# Altium PCB RobotCtrl_V2_Mother-board.PcbDoc
Units mm, origin at the board's own origin, x right, y up, seen from the top; angles counter-clockwise.
Board outline 100 x 100 mm, 2 copper layers (Top Layer, Bottom Layer); 90 components, 155 nets, 450 pads, 4 vias.
Unrouted connection lines stored in the file: 249.
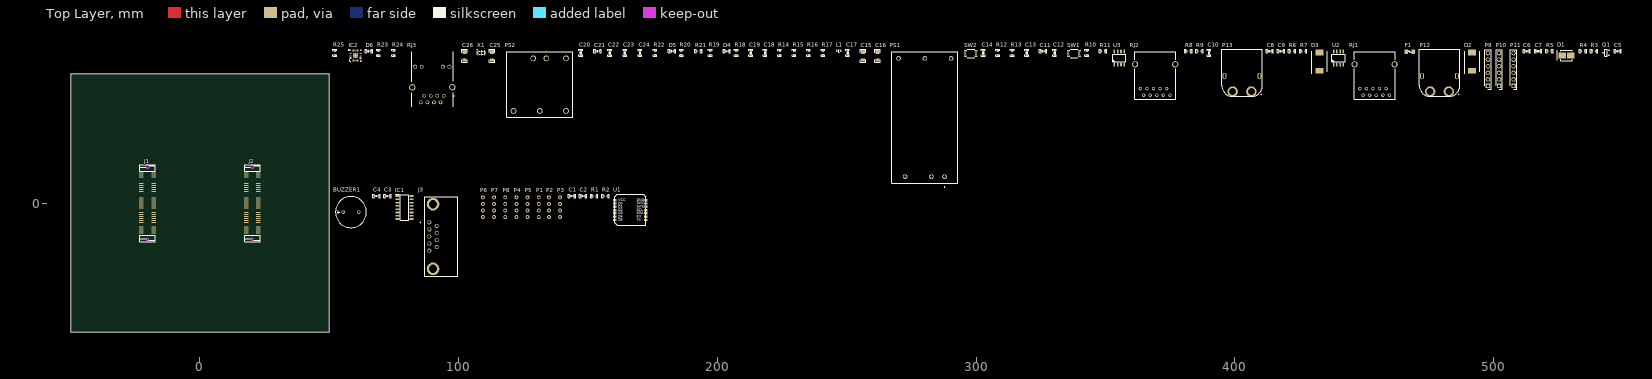
[diagram p0: Top Layer view]
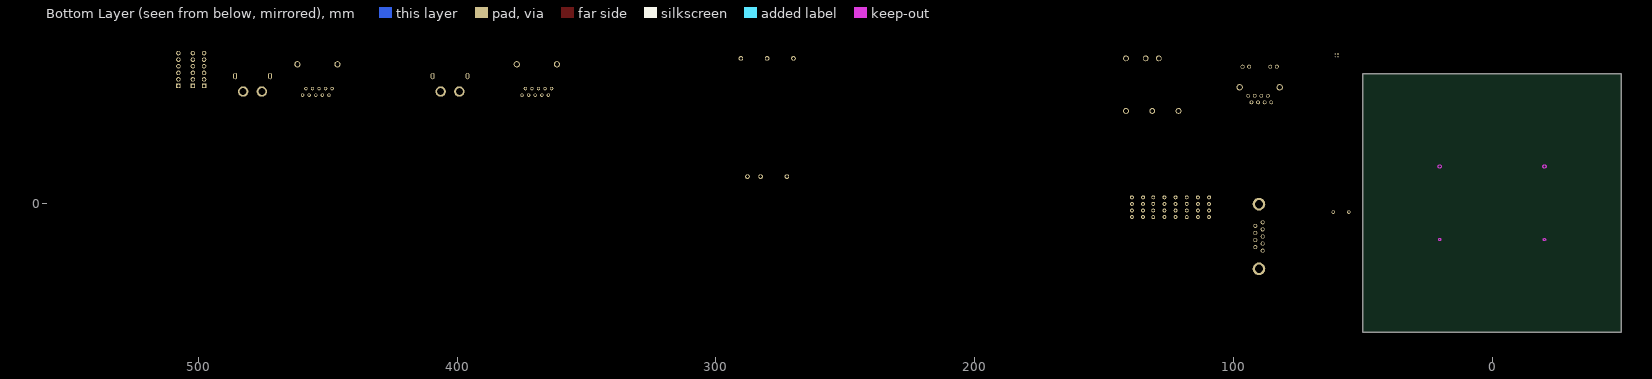
[diagram p1: Bottom Layer view, seen from below]

## Layer stack, top to bottom
Top Solder: solder mask 0.0102, Solder Resist, Dk 3.5
Top Layer: signal copper 0.0356
Dielectric 1: dielectric 0.32, FR-4, Dk 4.8
Bottom Layer: signal copper 0.0356
Bottom Solder: solder mask 0.0102, Solder Resist, Dk 3.5

## Board outline
-50,-50 50,-50 50,50 -50,50

## Design rules (kind name [scope] priority, off if disabled: settings)
Clearance [All] p1: gap=0.254 ignorepadtopadclearanceinfootprint=FALSE except(0: Arc-Hole Track-Hole SMDPad-Hole THPad-Hole Via-Hole Fill-Hole Poly-Hole Region-Hole Text-Hole)
DiffPairsRouting [All] p1: maxlimit=0.254 minlimit=0.254 mostfreqgap=0.254 toplayer_minwidth=0.381 toplayer_maxwidth=0.381 toplayer_prefwidth=0.381 bottomlayer_minwidth=0.381 bottomlayer_maxwidth=0.381 bottomlayer_prefwidth=0.381 maxuncoupledlength=12.7
PolygonConnect [All] p1: connectstyle=Relief reliefconductorwidth=0.254 reliefentries=4 polygonreliefangle="90 Angle" airgapwidth=0.254
RoomDefinition RobotCtrl_V2_Mother-board [InComponentClass('RobotCtrl_V2_Mother-board')] p1: confinementstyle=ConfineIn formatcopy=TRUE lockcomponents=FALSE outline 51.092,-29.553 549.821,-29.553 549.821,62.268 51.092,62.268
RoutingVias [All] p1: holewidth=0.711 width=1.27 viastyle="Through Hole" minholewidth=0.711 minwidth=1.27 maxholewidth=0.711 maxwidth=1.27
SolderMaskExpansion [All] p1: expansion=0.102 istentingtop=FALSE
Width [All] p1: maxlimit=0.254 minlimit=0.254 preferedwidth=0.254
29 further rules are at their usual default settings.

## Classes and differential pairs
differential pair CAN2: +CAN2_P -CAN2_N
differential pair CAN1: +CAN1_P -CAN1_N

## Components (designator, comment, footprint, x,y, rotation, side; value= is the part's Value field where it differs from the comment)
BUZZER1 "TMB12A12" DIP,P=7.6mm 58.331,-3.518 r0 top
C1 "10uF" CAP-0603 143.802,2.705 r0 top
C2 "100nF" CAP-0603 148.12,2.705 r0 top
C3 "100nF" CAP-0603 72.555,2.705 r0 top
C4 "100nF" CAP-0603 68.237,2.705 r0 top
C5 "100nF" CAP-0603 548.043,58.712 r0 top
C6 "100nF" CAP-0603 512.864,58.712 r0 top
C7 "100nF" CAP-0603 517.309,58.712 r0 top
C8 "47nF" CAP-0603 413.55,58.712 r0 top
C9 "47nF" CAP-0603 417.868,58.712 r0 top
C10 "100nF" CAP-0603 390.055,58.077 r90 top
C11 "47nF" CAP-0603 325.92,58.712 r0 top
C12 "47nF" CAP-0603 330.365,58.077 r90 top
C13 "100nF" CAP-0603 319.57,58.077 r90 top
C14 "100nF" CAP-0603 302.806,58.077 r90 top
C15 "100nF" CAP-AUX-3216 256.07,57.188 r90 top
C16 "100nF" CAP-AUX-3216 261.658,57.188 r90 top
C17 "100nF" CAP-0603 250.355,58.077 r90 top
C18 "100nF" CAP-0603 218.478,58.077 r90 top
C19 "100nF" CAP-0603 212.89,58.077 r90 top
C20 "10pF" CAP-0603 147.231,58.077 r90 top
C21 "10pF" CAP-0603 153.708,58.712 r0 top
C22 "10pF" CAP-0603 158.407,58.077 r90 top
C23 "10pF" CAP-0603 164.249,58.077 r90 top
C24 "22nF" CAP-0603 170.091,58.077 r90 top
C25 "100nF" CAP-AUX-3216 112.687,57.188 r90 top
C26 "100nF" CAP-AUX-3216 102.019,57.188 r90 top
D1 "SMBJ12CA" DO-214AA/SMB 528.231,57.061 r0 top
D2 "SS56" DO-214AB/SMC 491.782,54.648 r90 top
D3 "TPSMCJ30CA" DO-214AB/SMC 432.727,54.648 r90 top
D4 "GREEN" LED-0603 203.619,58.712 r0 top
D5 "GREEN" LED-0603 182.537,58.712 r0 top
D6 "GREEN" LED-0603 65.316,58.712 r0 top
F1 "7A 32V 快断" FUSE_1206 467.652,58.458 r0 top
IC1 "SP3232EEN-L/TR" SOIC-16_150mil 79.032,-1.74 r0 top
IC2 "LAN8720A-CP-TR" QFN-24-4x4 60.109,57.061 r0 top
J1 "3710M060037G3FT01" 3710M060037G3FT01 -22.606,-11.6 r180 top locked
J2 "3710M060037G3FT01" 3710M060037G3FT01 17.906,-11.6 r180 top locked
J3 "D-DMR009PF-D002" "Through Hole,P=2.77mm" 88.684,-7.455 r90 top
L1 "220R/2A/0.05DCR" L-0603 246.164,58.839 r0 top
P1 "HDR1x4_2.54" HDR1x4_2.54_180 130.975,2.197 r0 top
P2 "HDR1x4_2.54" HDR1x4_2.54_180 134.912,2.197 r0 top
P3 "HDR1x4_2.54" HDR1x4_2.54_180 139.23,2.197 r0 top
P4 "HDR1x4_2.54" HDR1x4_2.54_180 122.339,2.197 r0 top
P5 "HDR1x4_2.54" HDR1x4_2.54_180 126.657,2.197 r0 top
P6 "HDR1x4_2.54" HDR1x4_2.54_180 109.385,2.197 r0 top
P7 "HDR1x4_2.54" HDR1x4_2.54_180 113.703,2.197 r0 top
P8 "HDR1x4_2.54" HDR1x4_2.54_180 118.021,2.197 r0 top
P9 "HDR1x6" HDR1X6_2.54_180 497.878,45.25 r90 top
P10 "HDR1x6" HDR1X6_2.54_180 502.196,45.25 r90 top
P11 "HDR1x6" HDR1X6_2.54_180 507.784,45.25 r90 top
P12 "XT30/60" XT60PW-M 475.526,43.091 r0 top
P13 "XT30/60" XT60PW-M 399.199,43.091 r0 top
PS1 "URB2412LD-30WR3" URB2412LD30WR3 287.82,10.198 r90 top
PS2 "URB2405YMD-15WR3" URB2405YMD15WR3 133.896,55.918 r0 top
Q1 "S9013" SOT-23-3 543.471,58.077 r0 top
R1 "4.7k" R-0603 152.438,2.705 r0 top
R2 "4.7k" R-0603 156.756,2.705 r0 top
R3 "1k" R-0603 538.899,58.712 r0 top
R4 "10k" R-0603 534.581,58.712 r0 top
R5 "10k" R-0603 521.627,58.712 r0 top
R6 "60R" R-0603 422.186,58.712 r0 top
R7 "60R" R-0603 426.504,58.712 r0 top
R8 "60R" R-0603 382.054,58.712 r0 top
R9 "60R" R-0603 386.372,58.712 r0 top
R10 "60R" R-0603 342.811,58.077 r90 top
R11 "60R" R-0603 349.034,58.712 r0 top
R12 "60R" R-0603 308.394,58.077 r90 top
R13 "60R" R-0603 313.982,58.077 r90 top
R14 "49.9R" R-0603 224.066,58.077 r90 top
R15 "49.9R" R-0603 229.654,58.077 r90 top
R16 "49.9R" R-0603 235.242,58.077 r90 top
R17 "49.9R" R-0603 240.83,58.077 r90 top
R18 "510R" R-0603 207.302,58.077 r90 top
R19 "4.7k" R-0603 197.269,58.077 r90 top
R20 "510R" R-0603 186.093,58.077 r90 top
R21 "510R" R-0603 192.697,58.712 r0 top
R22 "4.7k" R-0603 175.933,58.077 r90 top
R23 "10k" R-0603 68.999,58.077 r90 top
R24 "12k" R-0603 74.841,58.077 r90 top
R25 "4.7k" R-0603 52.108,58.077 r90 top
RJ1 "R-RJ45R10P-B000" RRJ45R10PB000 459.778,41.694 r0 top
RJ2 "R-RJ45R10P-B000" RRJ45R10PB000 374.942,41.694 r0 top
RJ3 "HR911105A" HR911105A 94.272,41.44 r0 top
SW1 "KEY" KEY-4P-4.2*3.4*2.5 337.858,57.823 r0 top
SW2 "KEY" KEY-4P-4.2*3.4*2.5 297.98,57.823 r0 top
U1 "WT931" WT931 147.485,-12.789 r0 top
U2 "TJA1050" SOIC_8 440.093,56.045 r0 top
U3 "TJA1050" SOIC_8 355.384,56.045 r0 top
X1 "25MHz" SMD3213-3P 108.75,58.077 r0 top

## Footprints (in the part's own frame and the unit in brackets; to place one, negate y for a bottom-side part, rotate by r counter-clockwise, add the part's x,y. Pads: shape width x height; smd on the part's side, far side on the other; paste and mask are expansions set on the pad)
3710M060037G3FT01 [mm]
  rect 1.7x0.3 smd: 1(-4.7,0) 2(-4.7,-0.8) 3(-4.7,-1.6) 4(-4.7,-2.4) 5(-4.7,-3.2) 6(-4.7,-4) 7(-4.7,-4.8) 8(-4.7,-5.6) 9(-4.7,-6.4) 10(-4.7,-7.2) 11(-4.7,-8) 12(-4.7,-8.8) 13(-4.7,-9.6) 14(-4.7,-10.4) 15(-4.7,-11.2) 16(-4.7,-12) 17(-4.7,-12.8) 18(-4.7,-13.6) 19(-4.7,-14.4) 20(-4.7,-15.2) 21(-4.7,-16) 22(-4.7,-16.8) 23(-4.7,-17.6) 24(-4.7,-18.4) 25(-4.7,-19.2) 26(-4.7,-20) 27(-4.7,-20.8) 28(-4.7,-21.6) 29(-4.7,-22.4) 30(-4.7,-23.2) 31(0,-23.2) 32(0,-22.4) 33(0,-21.6) 34(0,-20.8) 35(0,-20) 36(0,-19.2) 37(0,-18.4) 38(0,-17.6) 39(0,-16.8) 40(0,-16) 41(0,-15.2) 42(0,-14.4) 43(0,-13.6) 44(0,-12.8) 45(0,-12) 46(0,-11.2) 47(0,-10.4) 48(0,-9.6) 49(0,-8.8) 50(0,-8) 51(0,-7.2) 52(0,-6.4) 53(0,-5.6) 54(0,-4.8) 55(0,-4) 56(0,-3.2) 57(0,-2.4) 58(0,-1.6) 59(0,-0.8) 60(0,0)
  Keep-Out Layer circle w0.152: c-2.35,2.525 r0.45
  Keep-Out Layer circle w0.152: c-2.35,-25.725 r0.65
  silkscreen extent -5.35,-26.47 0.65,3.27
CAP-0603 [mm]
  rect 0.8x0.96 smd: 1(-0.79,0) 2(0.79,0)
  silkscreen extent -1.42,-0.71 1.42,0.71, body extent -0.76,-0.39 0.76,0.39, height 0.9
CAP-AUX-3216 [mil] "îãµçÈÝ1206´óÐ¡"
  rect 50x60 smd: 1(44,-8) 2(-76,-8)
  silkscreen extent -111,-48 89,32, body extent -82,-45 52,26, height 67
DIP,P=7.6mm [mm]
  round 1.3 hole 0.8: 1(-2.952,0) 2(3.048,0)
  silkscreen extent -5.95,-6 6.04,6, body extent -5.95,-6 6.05,6, height 9.9
DO-214AA/SMB [mm]
  rect 2.85x2.25 smd: 1(1.675,0) 2(-1.675,0)
  silkscreen extent -3.6,-2 2.3,2, body extent -2.5,-1.97 2.5,1.97, height 2.44
DO-214AB/SMC [mm]
  rect 2.2x3.1 smd: 1(3.5,0) 2(-3.5,0)
  silkscreen extent -4.6,-2.95 3.97,2.95, body extent -3.97,-2.95 3.97,2.95, height 2.5
FUSE_1206 [mm]
  rect 1.3x1.7 smd: 1(-1.4,0) 2(1.4,0)
  silkscreen extent -0.53,-0.23 0.51,0.23, body extent -1.6,-0.8 1.6,0.8, height 1.01
HDR1x4_2.54_180 [mm]
  round 1.5 hole 0.813: 1(0,0) 2(0,-2.54) 3(0,-5.08) 4(0,-7.62)
  body extent -1.25,-8.89 1.25,1.27, height 8.2
HDR1X6_2.54_180 [mm]
  rect 1.725x1.725 hole 1.15: 1(0,0)
  round 1.725 hole 1.15: 2(2.54,0) 3(5.08,0) 4(7.62,0) 5(10.16,0) 6(12.7,0)
  silkscreen extent -1.27,-1.2 13.97,1.2, body extent -1.27,-1.2 13.97,1.2, height 8.58
HR911105A [mm]
  round 1.446 hole 0.89: 1(0,0) 2(-1.27,-2.54) 3(-2.54,0) 4(-3.81,-2.54) 5(-5.08,0) 6(-6.35,-2.54) 7(-7.62,0) 8(-8.89,-2.54)
  round 1.53 hole 1.02: 9(2.18,11.25) 10(-0.36,11.25) 11(-8.53,11.25) 12(-11.07,11.25)
  round 2.445 hole 1.63: MH1(3.3,3.3) MH2(-12.19,3.3)
  round 1.625 hole 3.25 unplated: MH3(1.27,6.35) MH4(-10.16,6.35)
  silkscreen extent -12.46,-4.3 4.1,17, body extent -12.39,-4.08 3.49,17.32, height 13.53
KEY-4P-4.2*3.4*2.5 [mm] "SKRPABE010"
  rect 1.2x0.65 smd: 1(-2.075,1.075) 1(2.075,1.075) 2(-2.075,-1.075) 2(2.075,-1.075)
  silkscreen extent -2.15,-1.6 2.05,1.6, body extent -2.35,-1.6 2.25,1.6, height 2.5
L-0603 [mm]
  rect 0.65x0.95 smd: 1(0,0) 2(1.5,0)
  silkscreen extent 0.57,-0.48 0.93,0.48, body extent -0.12,-0.48 1.63,0.48, height 0.35
LED-0603 [mm]
  rect 0.8x0.96 smd: 1(-0.79,0) 2(0.79,0)
  silkscreen extent -1.42,-0.71 1.42,0.71, body extent -0.81,-0.4 0.81,0.4, height 0.6
QFN-24-4x4 [mm] "QFN, 24-Leads, Body 4.00x4.00mm, Pitch 0.50mm, Thermal Pad 2.70x2.60mm, IPC Medium Density"
  oval 0.8x0.25 smd: 1(-1.95,1.25) 2(-1.95,0.75) 3(-1.95,0.25) 4(-1.95,-0.25) 5(-1.95,-0.75) 6(-1.95,-1.25) 13(1.95,-1.25) 14(1.95,-0.75) 15(1.95,-0.25) 16(1.95,0.25) 17(1.95,0.75) 18(1.95,1.25)
  oval 0.25x0.8 smd: 7(-1.25,-1.95) 8(-0.75,-1.95) 9(-0.25,-1.95) 10(0.25,-1.95) 11(0.75,-1.95) 12(1.25,-1.95) 19(1.25,1.95) 20(0.75,1.95) 21(0.25,1.95) 22(-0.25,1.95) 23(-0.75,1.95) 24(-1.25,1.95)
  rect 2x2 smd: 25(0,0)
  silkscreen extent -2.79,-2.2 2.2,2.2, body extent -2.07,-2.07 2.07,2.07, height 0.9
R-0603 [mm]
  rect 0.8x0.96 smd: 1(-0.79,0) 2(0.79,0)
  silkscreen extent -1.42,-0.71 1.42,0.71, body extent -0.76,-0.38 0.76,0.38, height 0.41
RRJ45R10PB000 [mm]
  round 1.3 hole 0.8: 1(0,0) 2(-1.27,2.54) 3(-2.54,0) 4(-3.81,2.54) 5(-5.08,0) 6(-6.35,2.54) 7(-7.62,0) 8(-8.89,2.54) 9(-10.16,0) 10(-11.43,2.54)
  round 1.6 hole 3.2 unplated: MH1(0,8.89) MH2(-11.43,8.89)
  round 2.4 hole 1.6: MH3(2.035,11.94) MH4(-13.465,11.94)
  silkscreen extent -13.61,-1.61 2.18,16.79, body extent -14.16,-1.61 2.74,16.79, height 13.45
SMD3213-3P [mm]
  rect 0.4x2.1 smd: 1(-1.2,0) 2(0,0) 3(1.2,0)
  silkscreen extent -1.6,-0.65 1.6,1.27, body extent -1.6,-0.65 1.6,0.65, height 0.7
SOIC-16_150mil [mm]
  rect 1.5x0.65 smd: 1(-2.7,4.445) 2(-2.7,3.175) 3(-2.7,1.905) 4(-2.7,0.635) 5(-2.7,-0.635) 6(-2.7,-1.905) 7(-2.7,-3.175) 8(-2.7,-4.445) 9(2.7,-4.445) 10(2.7,-3.175) 11(2.7,-1.905) 12(2.7,-0.635) 13(2.7,0.635) 14(2.7,1.905) 15(2.7,3.175) 16(2.7,4.445)
  silkscreen extent -3.45,-4.95 1.6,5.12, body extent -3,-4.95 3,4.95, height 1.75
SOIC_8 [mil]
  oval 24x60 smd: 1(-75,-100.02) 2(-25,-100.02) 3(25,-100.02) 4(75,-100.02) 5(75,99.98) 6(25,99.98) 7(-25,99.98) 8(-75,99.98)
  silkscreen extent -100,-55 100,55, body extent -96,-118 96,118, height 69
SOT-23-3 [mil]
  rect 30x24 smd: 1(47,-38) 2(47,38) 3(-47,0)
  silkscreen extent -21,-53 21,53, body extent -55,-57 55,57, height 51
"Through Hole,P=2.77mm" [mil]
  round 61.46 hole 40.98: 1(0,0) 2(-107.99,0) 3(-215.98,0) 4(-323.98,0) 5(-431.97,0) 6(-54.02,-111.97) 7(-162.01,-111.97) 8(-270,-111.97) 9(-377.99,-111.97)
  round 192.01 hole 128: MH1(-707.99,-55.98) MH2(276.02,-55.98)
  silkscreen extent -822,-430 391,141, body extent -826,-679 394,65, height 477
URB2405YMD15WR3 [mm]
  round 2.25 hole 1.5: 1(7.62,0) 2(0,0) 3(-5.08,0) 4(-12.7,-20.32) 5(-2.54,-20.32) 6(7.62,-20.32)
  silkscreen extent -15.24,-22.86 10.16,3.2, body extent -15.24,-22.86 10.16,2.54, height 12.3
URB2412LD30WR3 [mm]
  round 1.8 hole 1.2: 1(0,15.24) 2(0,5.08) 3(0,0) 4(45.72,-2.54) 5(45.72,7.62) 6(45.72,17.78)
  silkscreen extent -4.1,-5.08 48.26,20.32, body extent -2.54,-5.08 48.26,20.32, height 16.9
WT931 [mm]
  rect 1.4x0.9 smd: 1(12.812,13.866) 2(12.812,7.516) 3(12.812,8.786) 4(12.812,10.056) 5(12.812,6.246) 5(12.812,11.326) 6(12.812,12.596) 8(24.812,13.866) 9(24.812,12.596) 10(24.812,11.326) 11(24.812,10.056) 12(24.812,8.786) 13(24.812,7.516) 14(24.812,6.246)
  silkscreen extent 12.79,4.21 24.79,16.21, body extent 12.83,4.19 24.77,16.13, height 1.5
XT60PW-M [mm]
  oval 1.5x2.5 hole 0.7 slot 1.8 at 90 deg: 0(-3.15,6) 0(10.35,6)
  round 4 hole 2.7: 1(7.2,0) 2(0,0)
  silkscreen extent -4.2,-1.9 11.5,16.3, body extent -4.3,-1.95 11.6,16.35, height 8.45

## Part data
BUZZER1: library part BUZZER, "TMB12A12 有源蜂鸣器"
C1 C2 C3 C4 C5 C6 C7 C8 C9 C10 C11 C12 C13 C14 C17 C18 C19 C20 C21 C22 C23 C24: library part CAP, "贴片电容", Package=0402, SuppliersPartNumber=C52923, ComponentLink1Description=供应商链接, ComponentLink1URL=http://www.szlcsc.com/product/details_53938.html, Supplier=LC
C15 C16 C25 C26: library part CAP-POL, "KM101M050F115A", Package=3528, SuppliersPartNumber=C16133, ComponentLink1Description=供应商链接, ComponentLink1URL=http://www.szlcsc.com/product/details_16815.html, Supplier=LC
D1 D3: library part TVS_C
D2: library part DIODE_Schottky, "肖特基二极管"
D4 D5 D6: library part LED, "发光二极管", Package=0603, SuppliersPartNumber=C2290, ComponentLink1Description=供应商链接, ComponentLink1URL=http://www.szlcsc.com/product/details_2663.html, Supplier=LC
F1: library part Fuse, "0437007.WR"
IC1: library part SP3232EEN, "RS232 芯片", Manufacturer_Name=MaxLinear, Mouser Part Number=701-SP3232EEN-L/TR, Arrow Part Number=SP3232EEN-L/TR, Arrow Price/Stock=https://www.arrow.com/en/products/sp3232een-ltr/maxlinear-inc, Datasheet Link=https://www.maxlinear.com/ds/sp3222e_sp3232e.pdf, Height=1.75mm, Manufacturer_Part_Number=SP3232EEN-L/TR, Mouser Price/Stock=https://www.mouser.co.uk/ProductDetail/MaxLinear/SP3232EEN-L-TR?qs=Hy8V1%2FADhVKNh9v9NvoeCw%3D%3D
IC2: "Integrated Circuit", Manufacturer_Name=Microchip, Mouser Part Number=886-LAN8720A-CP-TR, Arrow Part Number=LAN8720A-CP-TR, Arrow Price/Stock=https://www.arrow.com/en/products/lan8720a-cp-tr/microchip-technology?region=nac, Datasheet Link=https://componentsearchengine.com/Datasheets/1/LAN8720A-CP-TR.pdf, Height=1mm, Manufacturer_Part_Number=LAN8720A-CP-TR, Mouser Price/Stock=https://www.mouser.co.uk/ProductDetail/Microchip-Technology/LAN8720A-CP-TR?qs=pA5MXup5wxG3QiSvrqf%2FHQ%3D%3D
J1 J2: library part 3710M/F, "B2B Connector"
J3: library part DB9, "D-Sub 连接器", Arrow Part Number=5747844-5, Manufacturer_Name="TE Connectivity", Mouser Part Number=571-5747844-5, Arrow Price/Stock=https://www.arrow.com/en/products/5747844-5/te-connectivity, Datasheet Link=http://www.te.com/commerce/DocumentDelivery/DDEController?Action=srchrtrv&DocNm=82068_AMPLIMITE_Right-Angle_Posted_Conn&DocType=Catalog+Section&DocLang=English&PartCntxt=, Height=12.9286mm, Manufacturer_Part_Number=5747844-5, Mouser Price/Stock=https://www.mouser.co.uk/ProductDetail/TE-Connectivity/5747844-5?qs=x6EjVpvqMVPrkQsJHUlJGw%3D%3D
L1: library part BEAD, "BLM18KG221SN1D", Package=0402, SuppliersPartNumber=C32041, ComponentLink1Description=供应商链接, ComponentLink1URL=http://www.szlcsc.com/product/details_33003.html, Supplier=LC
P1 P2 P3 P4 P5 P6 P7 P8: "Header"
P9 P10 P11: library part HDR1x6_2.54, "Header"
PS1: "金升阳隔离电源", Manufacturer_Name=Mornsun, Manufacturer_Part_Number=URB2412LD-30WHR3, Datasheet Link=https://4donline.ihs.com/images/VipMasterIC/IC/MNSN/MNSN-S-A0002273855/MNSN-S-A0002273855-1.pdf?hkey=EF798316E3902B6ED9A73243A3159BB0, Height=16.8mm
PS2: "金升阳隔离电源", Manufacturer_Name=Mornsun, Manufacturer_Part_Number=URB2405YMD-10WR3, Datasheet Link=https://www.mornsun-power.com/html/pdf/URB2405YMD-10WR3.html, Height=12.2mm
Q1: library part BJT_NPN
R1 R2 R3 R4 R5 R6 R7 R8 R9 R10 R11 R12 R13 R14 R15 R16 R17 R18 R19 R20 R21 R22 R23 R24 R25: library part RES, "贴片电阻", Package=0805, SuppliersPartNumber=C17798, Supplier=LC
RJ1 RJ2: library part RJ45
RJ3: library part RJ45_LED
SW1 SW2: "按键开关"
U1: "陀螺仪模组"
U2 U3: "CAN 控制器（5V）"
X1: library part XTAL, "CSTCE25M00G51-R0"

## Via types
v1: diameter 0.606, hole 0.3, Top Layer to Bottom Layer, 4 vias

## Nets (pads, with @x,y where several pads share a name; then routed paths per layer and width w, separated by ;. In a path a pad name is that pad's centre, name@x,y a point inside that pad or via, vN(x,y) a via of type N, cw(c..) or ccw(c..) an arc to the next point about the centre after c; other vN are vias at no path point)
CAN1_N: R8.2 R9.1 RJ1.2 U2.6
CAN1_P: R6.1 R7.2 RJ1.1 U2.7
CAN2_N: R12.2 R13.1 RJ2.2 U3.6
CAN2_P: R10.1 R11.2 RJ2.1 U3.7
GBAT: C15.2 C25.2 D3.1 P12.2 P13.2 PS1.2 PS2.2
GND: C1.2 C2.2 C3.1 C6.1 C7.1 C8.2 C9.2 C10.1 C11.2 C12.2 C13.1 C14.1 C16.2 C17.1 C18.1 C19.1 C20.1 C21.1 C22.1 C23.1 C24.1 C26.2 D1.1 D4.2 D5.2 D6.2 IC1.15 IC2.25 J1.31 J1.32 J2.30 J2.31 J3.5 P3.1 P3.2 P3.3 P3.4 P4.4 P5.4 P6.4 P7.4 P8.4 P11.1 P11.2 P11.3 P11.4 P11.5 P11.6 PS1.5 PS2.6 Q1.2 R4.1 R5.1 R20.1 R21.1 R23.2 R24.2 RJ1.MH1 RJ1.MH2 RJ1.MH3 RJ1.MH4 RJ2.MH1 RJ2.MH2 RJ2.MH3 RJ2.MH4 RJ3.7 RJ3.8 RJ3.MH1 RJ3.MH2 RJ3.MH3 RJ3.MH4 SW1.2 SW2.2 U1.8 U2.2 U2.8 U3.2 U3.8 X1.2
  other v1: 59.559,56.511 60.659,56.511 59.559,57.611 60.659,57.611
LED_LINK: IC2.3 RJ3.9
LED_SPEED: IC2.2 RJ3.10
NetBUZZER1_2: BUZZER1.2 Q1.3
NetC4_1: C4.1 IC1.3
NetC4_2: C4.2 IC1.1
NetC5_1: C5.1 IC1.5
NetC5_2: C5.2 IC1.4
NetC6_2: C6.2 IC1.2
NetC7_2: C7.2 IC1.6
NetC8_1: C8.1 R6.2 R8.1
NetC9_1: C9.1 R7.1 R9.2
NetC11_1: C11.1 R10.2 R12.1
NetC12_1: C12.1 R11.1 R13.2
NetC20_2: C20.2 IC2.21 R14.1 RJ3.1
NetC21_2: C21.2 IC2.20 R15.1 RJ3.2
NetC22_2: C22.2 IC2.23 R16.1 RJ3.3
NetC23_2: C23.2 IC2.22 R17.1 RJ3.6
NetD1_2: D1.2 J3.MH1 J3.MH2 R4.2
NetD2_1: D2.1 D3.2 F1.2
NetD4_A: D4.1 R19.1
NetD5_A: D5.1 R22.1
NetD6_A: D6.1 R25.1
NetF1_1: F1.1 P12.1 P13.1
NetIC2_4: IC2.4 X1.1
NetIC2_5: IC2.5 X1.3
NetIC2_12: IC2.12 R18.1
NetIC2_24: IC2.24 R24.1
NetQ1_1: Q1.1 R3.2 R5.2
NetR20_2: R20.2 RJ3.12
NetR21_2: R21.2 RJ3.11
PA0: J1.7
PA1: IC2.14 J1.6
PA2: J1.5 R18.2
PA3: J1.33 P8.3
PA4: J1.34
PA5: J1.35
PA6: J1.36
PA7: IC2.11 J1.37
PA8: J2.37
PA9: J2.36
PA10: J2.35
PA11: J2.34
PA12: J2.33
PA13: J2.32
PA14: J2.1
PA15: J2.2
PB0: J1.40
PB1: J1.41
PB2: J1.42
PB3: J2.21
PB4: J2.22
PB5: J2.23
PB6: J2.24
PB7: J2.25
PB8: J2.26
PB9: J2.27
PB10: IC1.10 J1.59
PB11: IC1.9 J1.60
PB12: J2.60 U3.1
PB13: J2.59 U3.4
PB14: J2.58
PB15: J2.57 P4.2
PC0: J1.11
PC1: IC2.13 J1.10
PC2: J1.9
PC3: J1.8
PC4: IC2.8 J1.38
PC5: IC2.7 J1.39
PC6: J2.41 R19.2
PC7: J2.40 R22.2
PC8: J2.39 R25.2
PC9: J2.38 R3.1
PC10: J2.3
PC11: J2.4
PC12: J2.5
PC13: J1.25
PC14: J1.24
PC15: J1.23
PD0: J2.6 U2.1
PD1: J2.7 U2.4
PD2: J2.8
PD3: IC2.15 J2.9 R23.1
PD4: J2.10
PD5: J2.11
PD6: J2.12
PD7: J2.13
PD8: J2.56 P5.2
PD9: J2.55 P6.2
PD10: J2.54 P7.2
PD11: J2.53 P8.2
PD12: J2.52 P4.3
PD13: J2.51 P5.3
PD14: J2.50 P6.3
PD15: J2.49 P7.3
PE0: J2.28
PE1: J2.29
PE2: C17.2 J1.30 SW2.1
PE3: C14.2 J1.29 SW1.1
PE4: J1.28
PE5: J1.27
PE6: J1.26
PE7: J1.50
PE8: J1.51
PE9: J1.52
PE10: J1.53
PE11: J1.54
PE12: J1.55
PE13: J1.56
PE14: J1.57
PE15: J1.58
PF0: J1.22 R2.1 U1.12
PF1: J1.21 R1.1 U1.11
PF2: J1.20 P2.1
PF3: J1.19 P2.2
PF4: J1.18 P2.3
PF5: J1.17 P2.4
PF6: J1.16
PF7: J1.15
PF8: J1.14
PF9: J1.13
PF10: J1.12
PF11: J1.43
PF12: J1.44
PF13: J1.45
PF14: J1.46
PF15: J1.47
PG0: J1.48
PG1: J1.49
PG2: J2.48
PG3: J2.47 P9.1
PG4: J2.46 P9.2
PG5: J2.45 P9.3
PG6: J2.44 P9.4
PG7: J2.43 P9.5
PG8: J2.42 P9.6
PG9: J2.14
PG10: J2.15
PG11: IC2.16 J2.16
PG12: J2.17
PG13: IC2.17 J2.18
PG14: IC2.18 J2.19
PG15: J2.20
RS232_RX: IC1.8 J3.3
RS232_TX: IC1.7 J3.2
VBAT: C15.1 C25.1 D2.2 PS1.3 PS2.3
VCC_3V3: C18.2 IC2.9 J1.3 J1.4 L1.1 P10.1 P10.2 P10.3 P10.4 P10.5 P10.6
VCC_3V3E: C19.2 C24.2 IC2.1 IC2.19 L1.2 R14.2 R15.2 R16.2 R17.2 RJ3.4 RJ3.5
VCC_5V: C1.1 C2.1 C3.2 C10.2 C13.2 C26.1 IC1.16 J1.1 J1.2 P4.1 P5.1 P6.1 P7.1 P8.1 PS2.1 PS2.4 R1.2 R2.2 U1.1 U2.3 U3.3
VCC_12V: BUZZER1.1 C16.1 P1.1 P1.2 P1.3 P1.4 PS1.1 PS1.4
pads on no net: IC1.11 IC1.12 IC1.13 IC1.14 IC2.6 IC2.10 J3.1 J3.4 J3.6 J3.7 J3.8 J3.9 P12.0 P13.0 PS1.6 PS2.5 RJ1.3 RJ1.4 RJ1.5 RJ1.6 RJ1.7 RJ1.8 RJ1.9 RJ1.10 RJ2.3 RJ2.4 RJ2.5 RJ2.6 RJ2.7 RJ2.8 RJ2.9 RJ2.10 U1.2 U1.3 U1.4 U1.5 U1.6 U1.9 U1.10 U1.13 U1.14 U2.5 U3.5

## Silkscreen, mask and mechanical layers (free items; w line width, h text height)
Mechanical 1:
  the board outline again, w0.254

## Text inside footprints (layer, text, board x,y; h text height)
P12: Top Overlay "+" at 486.026,41.091 h2
P13: Top Overlay "+" at 409.699,41.091 h2
U1: Top Overlay "TX" at 168.765,-6.995 h1; Top Overlay "RX" at 168.765,-5.629 h1; Top Overlay "SDA" at 168.765,-4.359 h1; Top Overlay "SCL" at 168.765,-3.089 h1; Top Overlay "SWD" at 168.765,-1.819 h1; Top Overlay "SWC" at 168.765,-0.549 h1; Top Overlay "GND" at 168.765,0.721 h1; Top Overlay "D5" at 161.734,-6.934 h1; Top Overlay "D4" at 161.734,-5.664 h1; Top Overlay "D3" at 161.734,-4.394 h1; Top Overlay "D2" at 161.734,-3.124 h1; Top Overlay "D1" at 161.734,-1.854 h1; Top Overlay "D0" at 161.734,-0.584 h1; Top Overlay "VCC" at 161.734,0.686 h1